# Altium PCB carteAction2026v3.PcbDoc
Units mm, origin at the board's own origin, x right, y up, seen from the top; angles counter-clockwise.
Board outline 86.61 x 58.42 mm, 2 copper layers (Top Layer, Bottom Layer); 46 components, 43 nets, 168 pads, 2 vias.
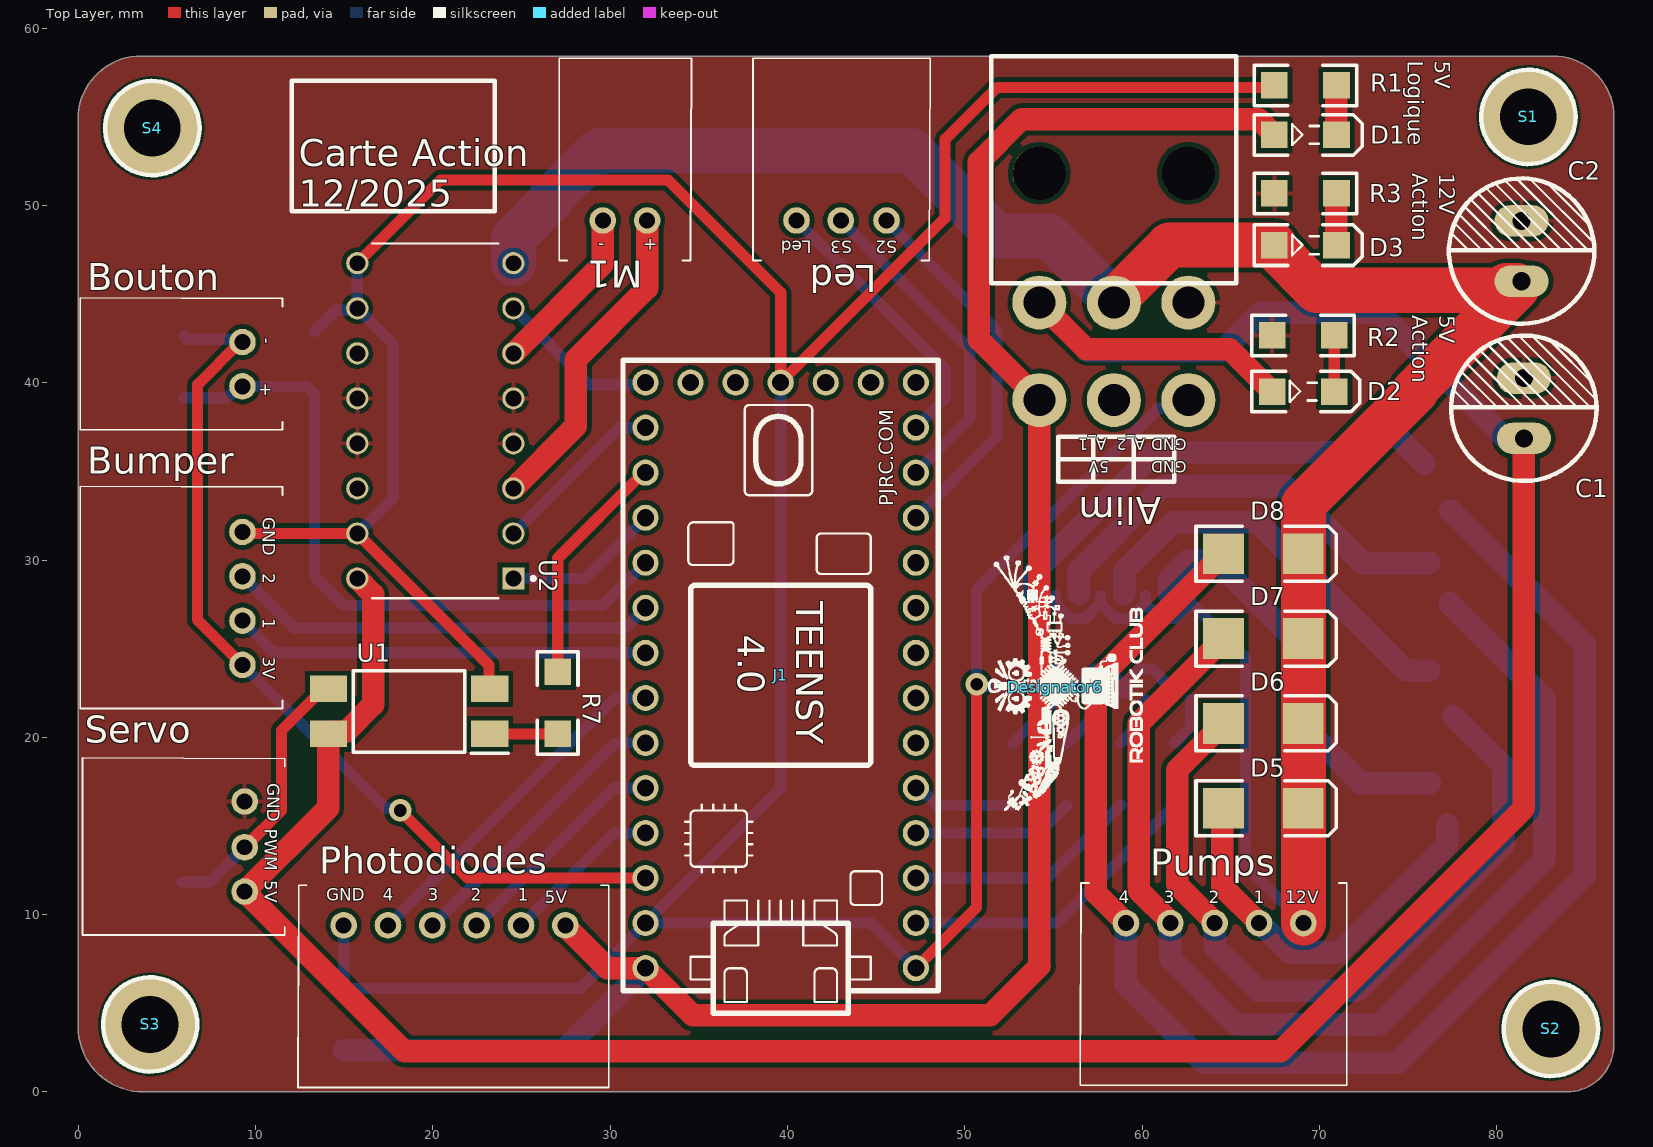
[diagram p0: Top Layer view]
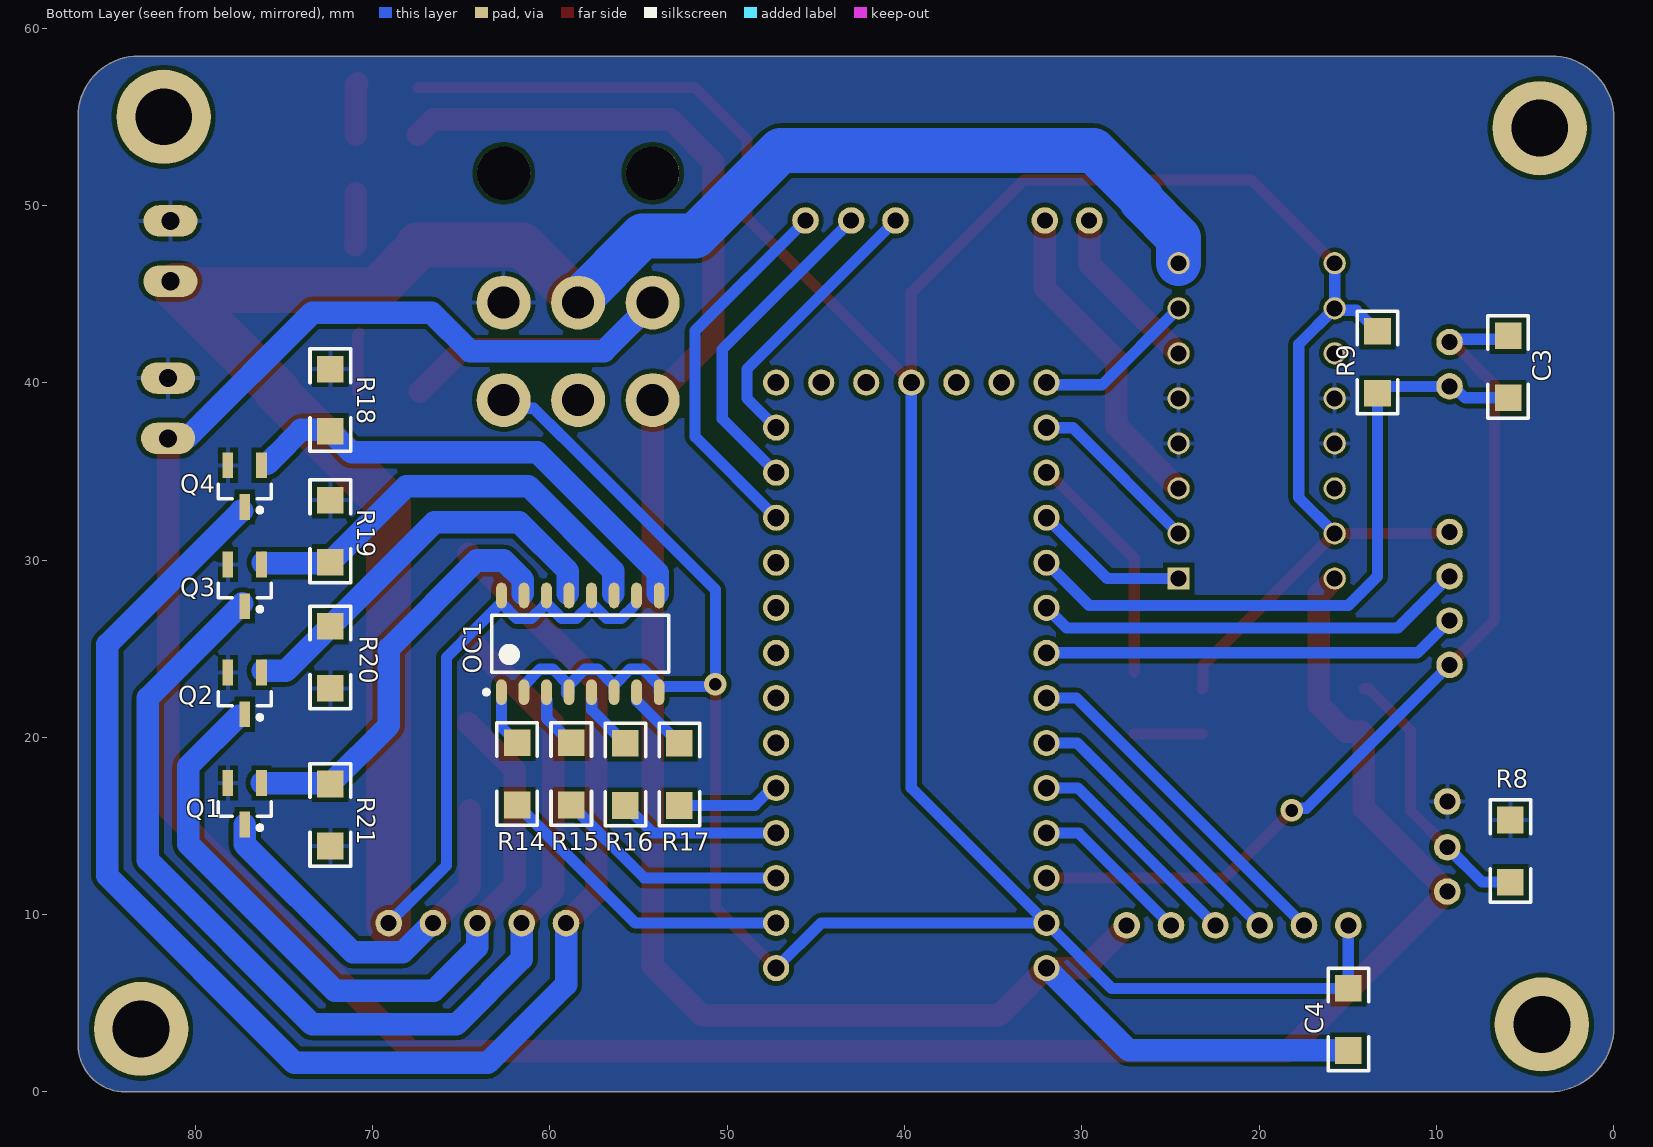
[diagram p1: Bottom Layer view, seen from below]
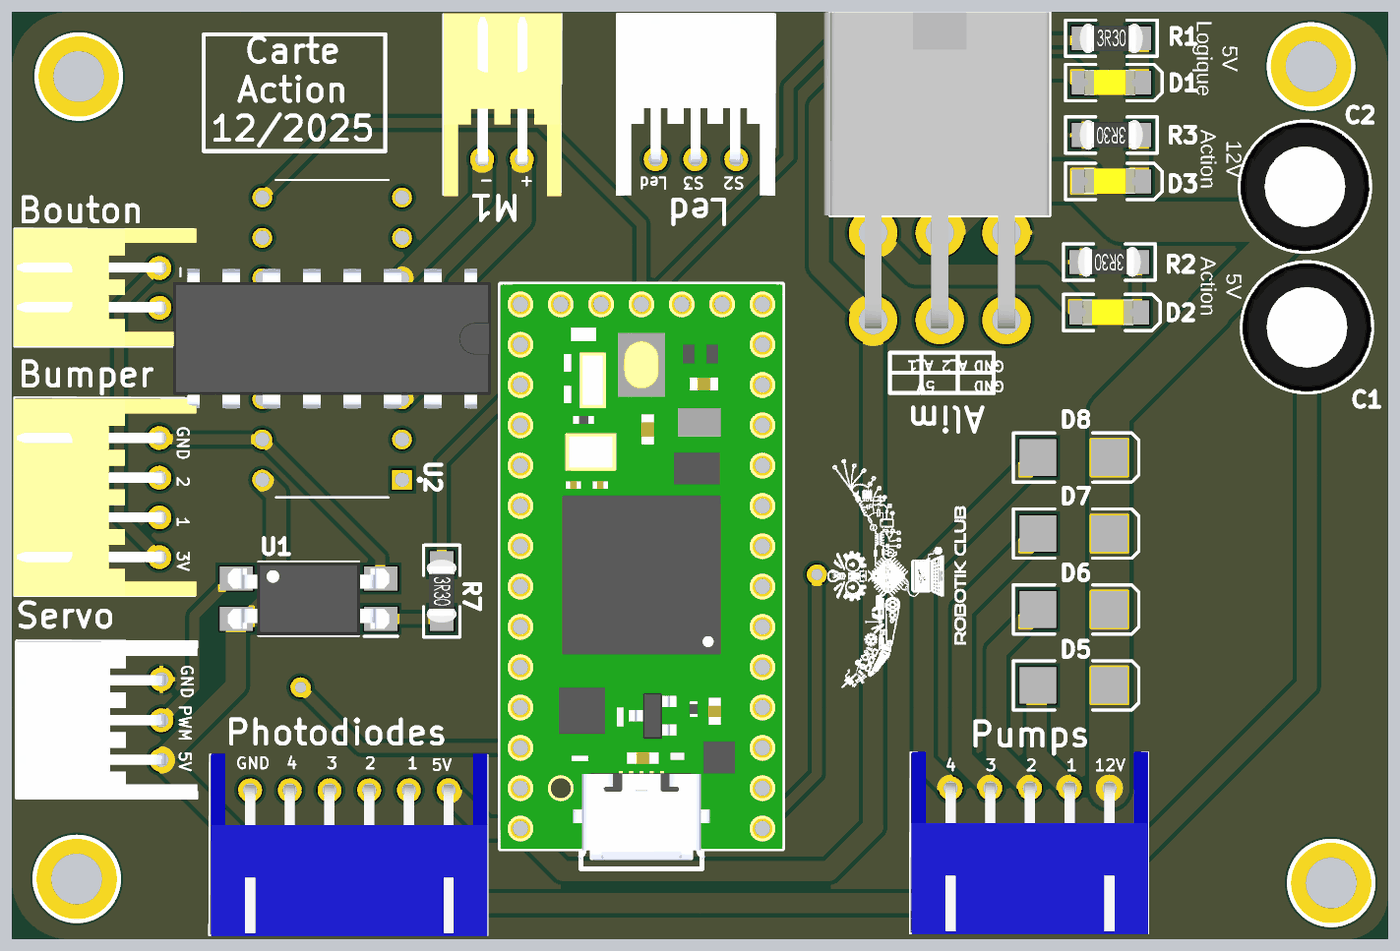
[diagram p2: 3D render of the assembled board from above, using the file's embedded part models]
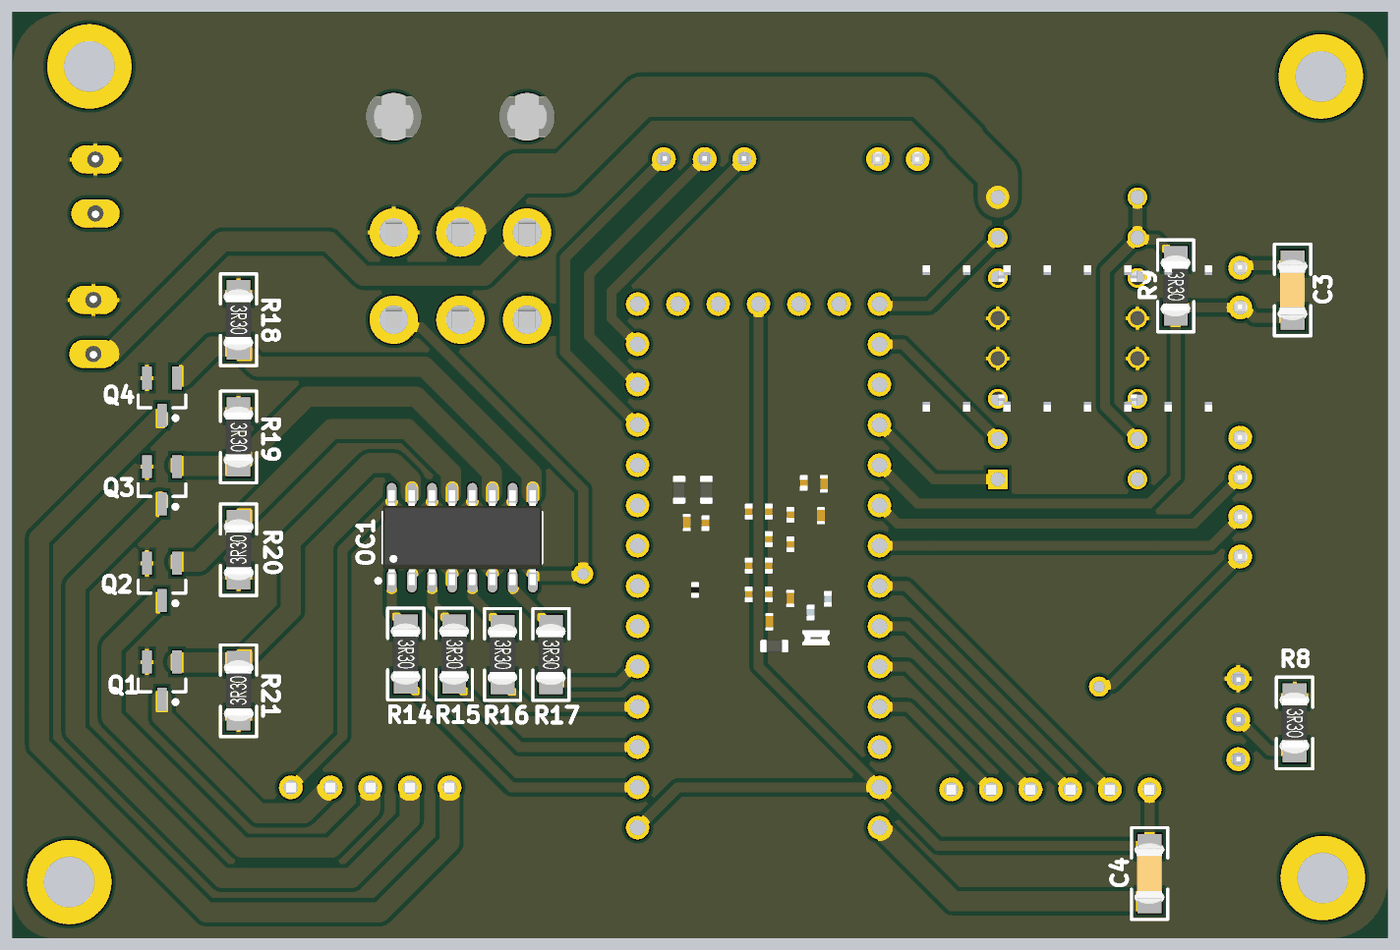
[diagram p3: 3D render of the assembled board from below, using the file's embedded part models]

## Layer stack, top to bottom
Top Solder: solder mask 0.0102, Solder Resist, Dk 3.5
Top Layer: signal copper 0.0356
Dielectric 1: dielectric 0.32, FR-4, Dk 4.8
Bottom Layer: signal copper 0.0356
Bottom Solder: solder mask 0.0102, Solder Resist, Dk 3.5

## Board outline
3.683,0 83.947,0 ccw(c83.947,2.667) 86.614,2.667 86.614,54.991 ccw(c83.185,54.991) 83.185,58.42 3.556,58.42 ccw(c3.556,54.864) 0,54.864 0,3.683 ccw(c3.683,3.683)

## Design rules (kind name [scope] priority, off if disabled: settings)
Clearance [All] p1: gap=0.254 ignorepadtopadclearanceinfootprint=FALSE
PolygonConnect [All] p1: connectstyle=Relief reliefconductorwidth=0.254 reliefentries=4 polygonreliefangle="90 Angle" airgapwidth=0.254
RoutingVias [All] p1: holewidth=0.711 width=1.27 viastyle="Through Hole" minholewidth=0.711 minwidth=1.27 maxholewidth=0.711 maxwidth=1.27
SolderMaskExpansion [All] p1: expansion=0.102 istentingtop=FALSE
SupplyNets "Schematic Supply Nets_5" [InNet('5V_A')] p1: voltage=0.000
SupplyNets "Schematic Supply Nets_4" [InNet('GND_A')] p2: voltage=0.000
SupplyNets "Schematic Supply Nets_3" [InNet('12V_A')] p3: voltage=0.000
SupplyNets "Schematic Supply Nets_2" [InNet('5V_L')] p4: voltage=0.000
SupplyNets "Schematic Supply Nets_1" [InNet('GND_L')] p5: voltage=0.000
SupplyNets "Schematic Supply Nets" [InNet('3V_L')] p6: voltage=0.000
Width [InNetClass('Pumps')] p1: maxlimit=2.54 minlimit=0.254 preferedwidth=1.27 minimp=50.000000 maximp=50.000000 favimp=50.000000
30 further rules are at their usual default settings.

## Classes and differential pairs
component class CarteAction_PontLevis2026: Bumper D5 D6 D7 D8 Led M1 OC1 Photodiodes Pumps Q1 Q2 Q3 Q4 R14 R15 R16 R17 R18 R19 R20 R21 U2
component class CarteAction2026: Alim Bouton C1 C2 C3 C4 D1 D2 D3 J1 R1 R2 R3 R7 R8 R9 S1 S2 S3 S4 Servo U1

## Components (designator, comment, footprint, x,y, rotation, side; value= is the part's Value field where it differs from the comment)
Alim "Header 3X2H" MOLEX_MINIFITJR_3X2 58.411,44.516 r180 top
Bouton "Header 2H" S2B-XH-A 9.271,39.791 r90 top
Bumper "Header 4H" S4B-XH-A 9.271,24.083 r90 top
C1 "Cap2" Condensateur 81.534,36.859 r90 top value=100µF
C2 "Cap2" Condensateur 81.407,45.72 r90 top value=100µF
C3 "Cap" "Capacitor 1206" 5.969,40.894 r270 bottom value=10nf
C4 "(Optional)" "Capacitor 1206" 14.979,4.092 r270 bottom value=10uF
D1 "5V_L" KP-3216SEC 69.215,53.975 r0 top
D2 "5V_A" KP-3216SEC 69.088,39.497 r0 top
D3 "12V_A" KP-3216SEC 69.215,47.752 r0 top
D5 "LGE SS12" SMB 66.845,16.002 r0 top
D6 "LGE SS12" SMB 66.845,20.786 r0 top
D7 "LGE SS12" SMB 66.845,25.569 r0 top
D8 "LGE SS12" SMB 66.845,30.353 r0 top
Designator6 "Comment" Logo_lowres 55.118,22.86 r90 top
J1 "TEENSY_4.0" TEENSY_4.0 39.624,23.495 r90 top
Led "Header 3" S3B-XH-A 40.513,49.149 r0 top (schematic designator S_23LED)
M1 "M1" S2B-XH-A 29.591,49.149 r0 top
OC1 "PhotoCoupler" "16 pins SOIC, TI" 58.293,25.273 r90 bottom
Photodiodes "Header 6H" S6B-XH-A 27.479,9.398 r180 top
Pumps "Header 5H" S5B-XH-A 69.095,9.525 r180 top
Q1 "MOSFET-N" SOT23_M 77.216,16.256 r270 bottom
Q2 "MOSFET-N" SOT23_M 77.216,22.479 r270 bottom
Q3 "MOSFET-N" SOT23_M 77.216,28.575 r270 bottom
Q4 "MOSFET-N" SOT23_M 77.216,34.163 r270 bottom
R1 "Res2" "Resistor 1206" 69.215,56.769 r0 top value=300
R2 "Res2" "Resistor 1206" 69.088,42.672 r180 top value=300
R3 "Res2" "Resistor 1206" 69.215,50.673 r180 top value=1K3
R7 "210" "Resistor 1206" 27.051,21.943 r270 top
R8 "Res2" "Resistor 1206" 5.842,13.589 r270 bottom value=10K
R9 "Res2" "Resistor 1206" 13.335,41.148 r270 bottom value=10K
R14 "Res2" "Resistor 1206" 61.849,17.935 r270 bottom value=210
R15 "Res2" "Resistor 1206" 58.801,17.935 r270 bottom value=210
R16 "Res2" "Resistor 1206" 55.753,17.907 r270 bottom value=210
R17 "Res2" "Resistor 1206" 52.705,17.907 r270 bottom value=210
R18 "Res2" "Resistor 1206" 72.39,39.017 r270 bottom value=10K
R19 "Res2" "Resistor 1206" 72.39,31.623 r270 bottom value=10K
R20 "Res2" "Resistor 1206" 72.39,24.511 r90 bottom value=10K
R21 "Res2" "Resistor 1206" 72.39,15.621 r90 bottom value=10K
S1 "Screw M3" "Screw M3" 81.788,54.991 r180 top
S2 "Screw M3" "Screw M3" 83.058,3.556 r180 top
S3 "Screw M3" "Screw M3" 4.064,3.81 r90 top
S4 "Screw M3" "Screw M3" 4.191,54.356 r90 top
Servo "Header 3" S3B-XH-A 9.398,11.303 r90 top
U1 "FOD817S" SOP254P1016X385-4N 18.669,21.463 r180 top
U2 "L293D" DIP880W50P254L2000H510Q16 20.148,37.846 r180 top

## Footprints (in the part's own frame and the unit in brackets; to place one, negate y for a bottom-side part, rotate by r counter-clockwise, add the part's x,y. Pads: shape width x height; smd on the part's side, far side on the other; paste and mask are expansions set on the pad)
"16 pins SOIC, TI" [mm] "SOIC, 16-Leads, Body 9,90x3,90mm, Pitch 1,27mm, IPC Medium Density"
  oval 1.45x0.6 smd: 1(-2.725,4.445) 2(-2.725,3.175) 3(-2.725,1.905) 4(-2.725,0.635) 5(-2.725,-0.635) 6(-2.725,-1.905) 7(-2.725,-3.175) 8(-2.725,-4.445) 9(2.725,-4.445) 10(2.725,-3.175) 11(2.725,-1.905) 12(2.725,-0.635) 13(2.725,0.635) 14(2.725,1.905) 15(2.725,3.175) 16(2.725,4.445)
  silkscreen extent -2.85,-5 1.6,5.42, body extent -3,-5 3,5, height 1.75
"Capacitor 1206" [mm]
  rect 1.5x1.5 smd: 1(-1.75,0) 2(1.75,0)
  silkscreen extent -2.89,-1.14 2.89,1.14, body extent -1.97,-0.99 1.97,0.96, height 1.3
Condensateur [mil]
  oval 70x120 hole 40: 1(0,0) 2(133.86,0)
  silkscreen extent -94,-161 228,161, body extent -93,-160 227,160, height 500
DIP880W50P254L2000H510Q16 [mm]
  rect 1.25x1.25 / inner round 1.25 / far side rect 1.25x1.25 hole 0.9: 1(-4.4,8.89)
  round 1.25 hole 0.9: 2(-4.4,6.35) 3(-4.4,3.81) 4(-4.4,1.27) 5(-4.4,-1.27) 6(-4.4,-3.81) 7(-4.4,-6.35) 8(-4.4,-8.89) 9(4.4,-8.89) 10(4.4,-6.35) 11(4.4,-3.81) 12(4.4,-1.27) 13(4.4,1.27) 14(4.4,3.81) 15(4.4,6.35) 16(4.4,8.89)
  silkscreen extent -5.63,-10 3.55,10, body extent -10,-4.62 10,4.62, height 5.1
KP-3216SEC [mm]
  rect 1.5x1.5 smd: 1(-1.75,0) 2(1.75,0)
  silkscreen extent -2.89,-1.14 3.2,1.14, body extent -1.7,-0.79 1.5,0.81, height 1.1
Logo_lowres [mm]
  silkscreen extent -7.01,-4.93 7.39,3.76
MOLEX_MINIFITJR_3X2 [mm] "MOLEX_MINIFITJR_3X2, 39-30-1060"
  round 3.048 hole 1.8: 1(-4.2,5.5) 2(-4.2,0) 3(0,5.5) 4(0,0) 5(4.2,5.5) 6(4.2,0)
  round 3 hole 3 unplated: 10(-4.2,-7.3) 11(4.2,-7.3)
  silkscreen extent -6.9,-13.9 6.9,-1.1, body extent -6.9,-13.9 7.3,6.04, height 11.41
"Resistor 1206" [mm]
  rect 1.5x1.5 smd: 1(-1.75,0) 2(1.75,0)
  silkscreen extent -2.89,-1.14 2.89,1.14, body extent -1.98,-0.95 1.98,0.93, height 0.55
S2B-XH-A [mm]
  round 1.5 hole 0.9: 1(0,0) 2(2.5,0)
  silkscreen extent -2.45,-2.26 5,9.14, body extent -2.41,-2.32 4.99,9.18, height 6.15
S3B-XH-A [mm]
  round 1.5 hole 0.9: 1(0,0) 2(2.5,0) 3(5.08,0)
  silkscreen extent -2.45,-2.26 7.54,9.14, body extent -2.44,-2.27 7.46,9.23, height 6.15
S4B-XH-A [mm]
  round 1.5 hole 0.9: 1(0,0) 2(2.5,0) 3(5,0) 4(7.5,0)
  silkscreen extent -2.45,-2.26 10.08,9.14, body extent -2.44,-2.32 9.96,9.18, height 6.15
S5B-XH-A [mm]
  round 1.5 hole 0.9: 1(0,0) 2(2.5,0) 3(5,0) 4(7.5,0) 5(10,0)
  silkscreen extent -2.45,-2.26 12.58,9.14, body extent -2.45,-2.3 12.45,9.2, height 6.15
S6B-XH-A [mm]
  round 1.5 hole 0.9: 1(0,0) 2(2.5,0) 3(5,0) 4(7.5,0) 5(10,0) 6(12.5,0)
  silkscreen extent -2.45,-2.26 15.08,9.14, body extent -2.45,-2.3 14.95,9.2, height 6.15
"Screw M3" [mm] "M3 iso Screw"
  round 5.32 hole 3.2 unplated: 0(0,0)
  silkscreen extent -2.66,-2.66 2.66,2.66
SMB [mm] "DO-214-AA/SMB; 2 C-Bend Leads; Body 5.3 x 3.6 mm, inc. leads (LxW)"
  rect 2.3x2.3 smd: 1(-2.25,0) 2(2.25,0)
  silkscreen extent -3.8,-1.55 4.1,1.55
SOP254P1016X385-4N [mm]
  rect 2.1x1.5 smd: 1(-4.55,1.27) 2(-4.55,-1.27) 3(4.55,-1.27) 4(4.55,1.27)
  silkscreen extent -5.6,-2.3 3.15,2.37, body extent -5.08,-2.3 5.08,2.3, height 3.85
SOT23_M [mm] "SOT23, 3-Leads, Body 2.9x1.3mm, Pitch 0.95mm, Lead Span 2.3mm - Reverse Pinning, IPC Low Density"
  rect 1.45x0.6 smd: 1(1.175,0) 2(-1.175,-0.95) 3(-1.175,0.95)
  silkscreen extent -0.1,-1.5 1.47,1.5, body extent -0.7,-1.5 0.7,1.5, height 1.1
TEENSY_4.0 [mil]
  round 58 hole 38: 0/RX(-550,-300) 1/TX(-450,-300) 2(-350,-300) 3/CANTX(-250,-300) 3V3_LN(650,-100) 3V3_LO(-450,300) 4/CANRX(-150,-300) 5(-50,-300) 6(50,-300) 7(150,-300) 8(250,-300) 9/CS(350,-300) 10/CS(450,-300) 11/MOSI(550,-300) 12/MISO(650,-300) 13/SCK(650,300) 14/A0(550,300) 15/A1(450,300) 16/A2(350,300) 17/A3(250,300) 18/A4/SDA(150,300) 19/A5/SCL(50,300) 20/A6(-50,300) 21/A7(-150,300) 22/A8(-250,300) 23/A9(-350,300) GND(-650,-300) GND2(-550,300) GND3(650,0) ON/OFF(650,200) PROG(650,100) VBAT\(650,-200) VIN(-650,300)
  silkscreen extent -750,-350 700,350, body extent -728,-350 700,350, height 172

## Part data
Alim: "Header, 3-Pin, Dual row, Right Angle", LatestRevisionDate=17-Jul-2002, LatestRevisionNote="Re-released for DXP Platform.", Publisher="Altium Limited"
Bouton: "Header, 2-Pin, Right Angle", LatestRevisionDate=17-Jul-2002, LatestRevisionNote="Re-released for DXP Platform.", Publisher="Altium Limited"
Bumper: "Header, 4-Pin, Right Angle", LatestRevisionDate=17-Jul-2002, LatestRevisionNote="Re-released for DXP Platform.", Publisher="Altium Limited"
C1 C2 C3: "Capacitor", Publisher="Altium Limited"
  C1 C2: PackageDescription="Capacitor; 2 Leads", PackageReference=CAPR5-4X5, Published=23-Sep-2002
  C3: LatestRevisionDate=17-Jul-2002, LatestRevisionNote="Re-released for DXP Platform.", PackageDescription="Radial Cap, Thru-Hole; 2 Leads; 0.3 in Pin Spacing", PackageReference=RAD-0.3, Published=8-Jun-2000
C4: library part Cap, "Capacitor", LatestRevisionDate=17-Jul-2002, LatestRevisionNote="Re-released for DXP Platform.", PackageDescription="Radial Cap, Thru-Hole; 2 Leads; 0.3 in Pin Spacing", PackageReference=RAD-0.3, Published=8-Jun-2000, Publisher="Altium Limited"
D1 D2 D3: library part LED2, "Typical RED, GREEN, YELLOW, AMBER GaAs LED", LatestRevisionDate=17-Jul-2002, LatestRevisionNote="Re-released for DXP Platform.", PackageDescription="SM LED; 2 Flat Leads", PackageReference=3.2X1.6X1.1, PackageVersion=Feb-2002, Published=8-Jun-2000, Publisher="Altium Limited"
D5 D6 D7 D8: library part Diode, "Default Diode", Code_JEDEC=DO-214-AB, LatestRevisionDate=17-Jul-2002, LatestRevisionNote="Re-released for DXP Platform.", PackageDescription="DO-214-AB/SMC; 2 C-Bend Leads; Body 7.9 x 5.9 mm, inc. leads (LxW)", PackageReference=SMC, PackageVersion=Sep-1996, Published=8-Jun-2000, Publisher="Altium Limited"
J1: Package=None, Check_prices=https://www.snapeda.com/parts/Teensy%204.0/PJRC/view-part/?ref=eda, MF=PJRC, MP="Teensy 4.0", SnapEDA_Link=https://www.snapeda.com/parts/Teensy%204.0/PJRC/view-part/?ref=snap
Led Servo: "Header, 3-Pin", LatestRevisionDate=17-Jul-2002, LatestRevisionNote="Re-released for DXP Platform.", Publisher="Altium Limited"
M1: library part "Header 2H", "Header, 2-Pin, Right Angle", LatestRevisionDate=17-Jul-2002, LatestRevisionNote="Re-released for DXP Platform.", Publisher="Altium Limited"
OC1: library part LTV-247, "Integrated Circuit", Manufacturer_Name=Lite-On, Mouser Part Number=859-LTV-247, Arrow Part Number=LTV-247, Arrow Price/Stock=https://www.arrow.com/en/products/ltv-247/lite-on-technology, Datasheet Link=http://optoelectronics.liteon.com/upload/download/DS70-2009-0014/LTV-2X7%20sereis%20Mar17.PDF, Manufacturer_Part_Number=LTV-247, Mouser Price/Stock=https://www.mouser.co.uk/ProductDetail/Lite-On/LTV-247/?qs=9ayhpukWNmvWpoxQBzWkFA%3D%3D
Photodiodes: "Header, 6-Pin, Right Angle", LatestRevisionDate=17-Jul-2002, LatestRevisionNote="Re-released for DXP Platform.", Publisher="Altium Limited"
Pumps: "Header, 5-Pin, Right Angle", LatestRevisionDate=17-Jul-2002, LatestRevisionNote="Re-released for DXP Platform.", Publisher="Altium Limited"
Q1 Q2 Q3 Q4: "N-Channel MOSFET", LatestRevisionDate=17-Jul-2002, LatestRevisionNote="Re-released for DXP Platform.", PackageDescription="TO, Flat Index; 3 In-Line, Axial Leads; Body Dia. 4.6mm; Lead Dia. 0.5 mm (max)", PackageReference=E3, PackageVersion=1995/1996, Published=8-Jun-2000, Publisher="Altium Limited"
R1 R2 R3 R8 R9 R14 R15 R16 R17 R18 R19 R20 R21: "Resistor", LatestRevisionDate=17-Jul-2002, LatestRevisionNote="Re-released for DXP Platform.", PackageDescription="Axial Device, Thru-Hole; 2 Leads; 0.4 in Pin Spacing", PackageReference=AXIAL-0.4, Published=8-Jun-2000, Publisher="Altium Limited"
R7: library part Res2, "Resistor", LatestRevisionDate=17-Jul-2002, LatestRevisionNote="Re-released for DXP Platform.", PackageDescription="Axial Device, Thru-Hole; 2 Leads; 0.4 in Pin Spacing", PackageReference=AXIAL-0.4, Published=8-Jun-2000, Publisher="Altium Limited"
U1: library part Optoisolator1, "4-Pin Phototransistor Optocoupler", DatasheetVersion=Nov-2003, LatestRevisionDate=04-Mar-2005, LatestRevisionNote="Sch pins 3 & 4 Swapped.", PackageReference=DIP-4, Published=24-Mar-1999, Publisher="Altium Limited"
U2: "Bipolar Motor Driver - Parallel 16-PowerDIP", Package="DIP-16 STMicroelectronics", Availability="In Stock", Check_prices=https://www.snapeda.com/parts/L293D/STMicroelectronics/view-part/?ref=eda, MF=STMicroelectronics, MP=L293D, Price=None, Purchase-URL=https://pricing.snapeda.com/search/part/L293D/?ref=eda, SnapEDA_Link=https://www.snapeda.com/parts/L293D/STMicroelectronics/view-part/?ref=snap

## Via types
v1: diameter 1.27, hole 0.711, Top Layer to Bottom Layer, 2 vias

## Nets (pads, with @x,y where several pads share a name; then routed paths per layer and width w, separated by ;. In a path a pad name is that pad's centre, name@x,y a point inside that pad or via, vN(x,y) a via of type N, cw(c..) or ccw(c..) an arc to the next point about the centre after c; other vN are vias at no path point)
3V_L: Bouton.2 Bumper.1 C3.1 J1.3V3_LO | length 51.6
  Top Layer w0.635: Bouton.2@9.144,42.291 6.731,39.878 6.731,26.623 Bumper.1 ; v1(18.161,15.875) 21.971,12.065 J1.3V3_LO
  Bottom Layer w0.635: C3.1 6.156,42.457 8.978,42.457 Bouton.2@9.271,42.164 ; Bumper.1@9.144,24.13 9.224,24.13 17.357,15.997 18.039,15.997 v1(18.161,15.875)
5V_A: Alim.6 C1.1 D2.1 Servo.1 U1.4 U2.16 | length 171.2
  Top Layer w1.27: U1.4@14.097,20.066 14.097,16.002 Servo.1 18.415,2.286 67.818,2.286 81.534,16.002 C1.1 ; U1.4 14.234,20.308 15.101,20.308 16.637,21.844 16.637,28.067 U2.16 ; Alim.6@54.229,44.45 54.277,44.45 56.833,41.894 64.941,41.894 D2.1
  Bottom Layer w1.27: Alim.6 56.944,41.783 64.516,41.783 66.675,43.942 73.406,43.942 80.392,36.956 81.437,36.956 C1.1
5V_L: Alim.5 C4.2 D1.1 J1.VIN Photodiodes.1 | length 113.6
  Top Layer w1.27: Photodiodes.1@27.476,9.354 29.845,6.985 J1.VIN 34.671,4.318 51.435,4.318 54.229,7.112 ; Alim.5@54.102,38.862 54.211,38.753 54.211,7.094 ; Alim.5 50.8,42.427 50.8,52.451 53.213,54.864 66.576,54.864 D1.1
  Bottom Layer w1.27: C4.2 27.361,2.342 J1.VIN
12V_A: Alim.4 C2.1 D3.1 D5.2 D6.2 D7.2 D8.2 OC1.10 OC1.12 OC1.14 OC1.16 Pumps.1 U2.8 | length 139.1
  Top Layer w2.54: Alim.4 58.411,44.627 61.536,47.752 D3.1 67.465,47.597 69.85,45.212 80.264,45.212 80.518,45.466 C2.1@81.153,45.466 ; Pumps.1 D5.2 D6.2 D7.2 D8.2 69.095,33.154 75.438,39.497 ; 75.374,39.56 C2.1@81.153,45.339
  Bottom Layer w0.635: OC1.10 55.118,27.608 55.181,27.544 55.181,27.498 55.978,26.701 56.798,26.701 57.64,27.544 OC1.12@57.64,27.59 ; OC1.12 57.658,27.608 57.721,27.544 57.721,27.498 58.518,26.701 59.338,26.701 60.18,27.544 OC1.14@60.18,27.59 ; OC1.14 60.198,27.608 60.261,27.544 60.261,27.498 61.058,26.701 61.878,26.701 62.72,27.544 OC1.16@62.72,27.59 ; OC1.16 62.738,27.608 65.842,24.504 65.842,12.778 68.841,9.779 Pumps.1@68.961,9.779
  Bottom Layer w2.54: U2.8 24.548,48.17 26.67,50.292 ; 26.607,50.355 29.337,53.086 46.99,53.086 51.816,48.26 54.778,48.26 Alim.4@58.42,44.618
enable: J1.16/A2 U2.1 | length 8.9
  Bottom Layer w0.635: U2.1@24.511,28.956 28.575,28.956 J1.16/A2
GND_A: Alim.2 C1.2 C2.2 Q1.2 Q2.2 Q3.2 Q4.2 R2.2 R3.2 R8.1 R18.1 R19.1 R20.1 R21.1 Servo.3 U2.4 U2.5 U2.12 U2.13
GND_L: Alim.1 Bumper.4 C4.1 J1.GND J1.GND2 J1.GND3 OC1.2 OC1.4 OC1.6 OC1.8 Photodiodes.6 R1.1 R9.1 U1.2 U2.9 U2.10 U2.15 | length 234.9
  Top Layer w0.635: Bumper.4 9.358,31.496 U2.15 23.18,24.064 23.18,22.772 U1.2 ; U2.9@15.748,46.863 15.875,46.863 20.447,51.435 33.274,51.435 39.624,45.085 J1.GND3 48.895,49.276 48.895,53.721 51.816,56.642 R1.1@67.437,56.642 ; J1.GND 50.673,10.414 v1(50.673,22.987)
  Bottom Layer w0.635: R9.1 14.515,44.078 15.63,44.078 U2.10 ; Photodiodes.6@14.986,9.398 14.979,9.391 C4.1 28.321,5.842 J1.GND2 ; U2.15 17.78,33.528 17.78,42.164 U2.10 ; U2.9 U2.10 ; J1.GND3 39.624,17.145 J1.GND2 ; J1.GND 44.704,9.525 J1.GND2 ; OC1.8@53.83,22.865 50.795,22.865 v1(50.673,22.987) 50.673,28.321 59.273,36.921 59.279,36.921 60.913,38.554 62.149,38.554 Alim.1 ; OC1.8 53.848,22.938 54.754,23.844 55.482,23.844 OC1.6@56.37,22.956 ; OC1.6 56.388,22.938 57.294,23.844 58.019,23.844 59.055,22.808 OC1.4@59.055,22.479 ; OC1.4 58.928,22.938 59.834,23.844 60.562,23.844 OC1.2@61.45,22.956
NetD1_2: D1.2 R1.2 | length 3
  Top Layer w1.27: R1.2@70.866,56.896 70.965,56.797 D1.2
NetD2_2: D2.2 R2.1 | length 3.3
  Top Layer w0.635: R2.1@70.739,42.799 70.838,42.7 D2.2
NetD3_2: D3.2 R3.1 | length 2.9
  Top Layer w1.27: R3.1 70.965,47.78 D3.2@70.993,47.752
NetM1_1: M1.1 U2.6 | length 9.6
  Top Layer w1.27: U2.6 29.591,46.699 M1.1
NetM1_2: M1.2 U2.3 | length 18.2
  Top Layer w1.27: U2.3 28.067,37.555 28.067,41.309 32.091,45.333 M1.2
NetOC1_1: OC1.1 R14.1 | length 2.8
  Bottom Layer w0.635: R14.1 62.738,20.574 OC1.1@62.738,22.14
NetOC1_3: OC1.3 R15.1 | length 3
  Bottom Layer w0.635: R15.1 60.18,21.064 OC1.3@60.18,22.14
NetOC1_5: OC1.5 R16.1 | length 3.3
  Bottom Layer w0.635: R16.1 57.64,21.544 OC1.5@57.64,22.14
NetOC1_7: OC1.7 R17.1 | length 3.5
  Bottom Layer w0.635: R17.1 55.1,22.052 OC1.7@55.1,22.14
NetR7_2: R7.2 U1.1 | length 3.8
  Top Layer w0.635: U1.1 R7.2
O_Pump_1: OC1.15 Q1.3 R21.2 | length 23.7
  Bottom Layer w1.27: OC1.15@61.531,28.088 61.531,28.898 62.606,29.972 62.865,29.972 64.135,29.972 69.088,25.019 69.088,20.673 R21.2@72.376,17.385 ; R21.2@72.39,17.399 72.392,17.401 76.236,17.401 Q1.3
O_Pump_2: OC1.13 Q2.3 R20.2 | length 23.1
  Bottom Layer w1.27: OC1.13@58.991,28.088 58.991,29.38 61.743,32.131 66.52,32.131 72.362,26.289 R20.2@72.39,26.289 ; R20.2 74.902,23.749 Q2.3@76.2,23.749
O_Pump_3: OC1.11 Q3.3 R19.2 | length 24.9
  Bottom Layer w1.27: OC1.11@56.434,28.088 56.434,29.383 61.214,34.163 68.1,34.163 R19.2 72.452,29.811 76.166,29.811 Q3.3@76.2,29.845
O_Pump_4: OC1.9 Q4.3 R18.2 | length 27.3
  Bottom Layer w1.27: OC1.9@53.911,28.088 53.911,29.273 60.706,36.068 71.191,36.068 72.461,37.338 74.041,37.338 74.785,36.594 74.785,36.574 75.931,35.428
O_PWM: R8.2 Servo.2 U1.3 | length 15.4
  Top Layer w0.635: Servo.2 11.475,15.88 11.475,20.389 13.819,22.733 U1.3@14.097,22.733
  Bottom Layer w0.635: R8.2 7.434,11.839 Servo.2
Pump_1: D5.1 Pumps.2 Q1.1 | length 22.1
  Top Layer w1.27: D5.1@64.516,15.875 64.516,11.604 Pumps.2
  Bottom Layer w1.27: Pumps.2 66.657,9.525 68.296,7.886 71.132,7.886 77.216,13.97 Q1.1
Pump_2: D6.1 Pumps.3 Q2.1 | length 43.7
  Top Layer w1.27: Pumps.3 64.095,9.587 61.976,11.706 61.976,18.167 D6.1
  Bottom Layer w1.27: Pumps.3 64.095,8.168 66.548,5.715 72.136,5.715 80.391,13.97 80.391,18.374 77.551,21.214
Pump_3: D7.1 Pumps.4 Q3.1 | length 63.9
  Top Layer w1.27: Pumps.4 61.595,9.587 59.817,11.365 59.817,20.791 D7.1@64.553,25.527
  Bottom Layer w1.27: Pumps.4 61.595,7.493 65.278,3.81 73.406,3.81 82.677,13.081 82.677,22.225 Q3.1@77.343,27.559
Pump_4: D8.1 Pumps.5 Q4.1 | length 83.8
  Top Layer w1.27: Pumps.5 57.404,11.216 57.404,23.162 D8.1
  Bottom Layer w1.27: Pumps.5 59.095,6.056 63.5,1.651 74.422,1.651 84.963,12.192 84.963,25.235 77.432,32.766 Q4.1@77.343,32.766
T_Bump_1: Bumper.2 J1.19/A5/SCL | length 23.5
  Bottom Layer w0.635: Bumper.2@9.271,26.543 9.311,26.543 11.089,24.765 J1.19/A5/SCL
T_Bump_2: Bumper.3 J1.18/A4/SDA | length 24.4
  Bottom Layer w0.635: Bumper.3 12.192,26.162 30.861,26.162 J1.18/A4/SDA
T_Homolog: Bouton.1 C3.2 J1.17/A3 R9.2 | length 38.6
  Bottom Layer w0.635: C3.2 8.39,39.144 8.997,39.751 Bouton.1@9.271,39.751 ; Bouton.1 12.902,39.791 13.335,39.358 R9.2@13.335,39.243 ; R9.2@13.335,39.37 13.335,29.083 14.986,27.432 29.591,27.432 J1.17/A3
T_LED: J1.11/MOSI Led.1 | length 15.8
  Bottom Layer w0.635: Led.1 48.895,40.767 48.895,39.116 J1.11/MOSI
T_M_Sens1: J1.14/A0 U2.2 | length 10.1
  Bottom Layer w0.635: U2.2 30.517,37.465 J1.14/A0@32.131,37.465
T_M_Sens2: J1.13/SCK U2.7 | length 9.2
  Bottom Layer w0.635: U2.7 28.866,39.878 J1.13/SCK@32.004,39.878
T_OUT_1: J1.23/A9 Photodiodes.2 | length 9.3
  Bottom Layer w0.635: Photodiodes.2 30.186,14.605 J1.23/A9@32.131,14.605
T_OUT_2: J1.22/A8 Photodiodes.3 | length 12.7
  Bottom Layer w0.635: Photodiodes.3 30.226,17.145 J1.22/A8
T_OUT_3: J1.21/A7 Photodiodes.4 | length 16.3
  Bottom Layer w0.635: Photodiodes.4 30.266,19.685 J1.21/A7
T_OUT_4: J1.20/A6 Photodiodes.5 | length 19.8
  Bottom Layer w0.635: Photodiodes.5 30.306,22.225 J1.20/A6
T_Pump_1: J1.0/RX R14.2 | length 17.4
  Bottom Layer w0.635: J1.0/RX 55.189,9.525 R14.2
T_Pump_2: J1.1/TX R15.2 | length 13.3
  Bottom Layer w0.635: J1.1/TX 54.681,12.065 R15.2
T_Pump_3: J1.2 R16.2 | length 9.2
  Bottom Layer w0.635: J1.2 54.201,14.605 R16.2
T_Pump_4: J1.3/CANTX R17.2 | length 5.9
  Bottom Layer w0.635: J1.3/CANTX 47.471,17.145 48.459,16.157 R17.2
T_PWM: J1.15/A1 R7.1 | length 13.2
  Top Layer w0.635: R7.1 27.051,30.099 J1.15/A1@31.877,34.925
T_S2: J1.9/CS Led.3 | length 21.2
  Bottom Layer w0.635: Led.3 51.816,42.926 51.816,36.957 J1.9/CS
T_S3: J1.10/CS Led.2 | length 18.7
  Bottom Layer w0.635: Led.2 50.292,41.87 50.292,37.973 J1.10/CS@47.117,34.798
pads on no net: Alim.3 Alim.10 Alim.11 J1.3V3_LN J1.4/CANRX J1.5 J1.6 J1.7 J1.8 J1.12/MISO J1.ON/OFF J1.PROG J1.VBAT\ S1.0 S2.0 S3.0 S4.0 U2.11 U2.14

## Polygon pours and split planes (outlines as drawn)
GND_A on Top Layer "GND_A_L01_P000" (solid, remove dead copper, pour order 0): 3.683,0 83.947,0 ccw(c83.947,2.667) 86.614,2.667 86.614,54.991 ccw(c83.185,54.991) 83.185,58.42 3.556,58.42 ccw(c3.556,54.864) 0,54.864 0,3.683 ccw(c3.683,3.683)
GND_A on Bottom Layer "GND_A_L02_P001" (solid, remove dead copper, pour order 1): 3.683,0 83.947,0 ccw(c83.947,2.667) 86.614,2.667 86.614,54.991 ccw(c83.185,54.991) 83.185,58.42 3.556,58.42 ccw(c3.556,54.864) 0,54.864 0,3.683 ccw(c3.683,3.683)

## Silkscreen, mask and mechanical layers (free items; w line width, h text height)
Top Overlay:
  lines w0.254: 55.43,35.687 61.806,35.687 ; 57.259,34.417 57.259,36.957 ; 59.545,34.417 59.545,36.957 ; 12.065,49.657 23.495,49.657 23.495,57.023 12.065,57.023 12.065,49.657 ; 55.278,34.417 61.806,34.417 61.806,36.957 55.278,36.957 55.278,34.417
  text "5V / Logique" at 74.676,58.164 h1.52 r270
  text "12V / Action" at 74.93,51.814 h1.52 r270
  text "Carte Action / 12/2025" at 12.448,49.911 h1.52
  text "Led" at 41.362,48.006 h0.7 r180
  text "S3" at 43.648,48.006 h0.7 r180
  text "S2" at 46.188,48.006 h0.7 r180
  text "-" at 29.337,47.529 h0.7
  text "+" at 31.877,47.498 h0.7
  text "5V / Action" at 74.93,43.813 h1.52 r270
  text "-" at 10.318,42.545 h0.7 r270
  text "+" at 10.287,40.005 h0.7 r270
  text "A_1" at 58.021,36.83 h0.64 r180
  text "A_2" at 60.18,36.83 h0.64 r180
  text "GND" at 62.517,36.83 h0.64 r180
  text "5V" at 58.148,35.56 h0.64 r180
  text "GND" at 62.517,35.56 h0.64 r180
  text "GND" at 10.414,32.425 h0.7 r270
  text "2" at 10.414,29.25 h0.7 r270
  text "1" at 10.414,26.71 h0.7 r270
  text "3V" at 10.414,24.551 h0.7 r270
  text "GND" at 10.668,17.399 h0.7 r270
  text "PWM" at 10.541,14.859 h0.7 r270
  text "5V" at 10.541,11.938 h0.7 r270
  text "GND" at 14.01,10.773 h0.7
  text "4" at 17.185,10.773 h0.7
  text "3" at 19.725,10.773 h0.7
  text "2" at 22.138,10.773 h0.7
  text "1" at 24.805,10.773 h0.7
  text "5V" at 26.329,10.656 h0.7
  text "4" at 58.681,10.646 h0.7
  text "3" at 61.221,10.646 h0.7
  text "2" at 63.761,10.646 h0.7
  text "1" at 66.301,10.646 h0.7
  text "12V" at 68.079,10.646 h0.7

## Text inside footprints (layer, text, board x,y; h text height)
J1: Top Overlay "PJRC.COM" at 45.974,33.02 h0.81 r90; Top Overlay "4.0" at 37.211,25.781 h1.52 r270; Top Overlay "TEENSY" at 40.513,27.686 h1.52 r270